# Altium PCB PCB.PcbDoc
Units mil, origin at the board's own origin, x right, y up, seen from the top; angles counter-clockwise.
Board outline 440 x 605 mil, 2 copper layers (Top Layer, Bottom Layer); 6 components, 4 nets, 26 pads, 0 vias.
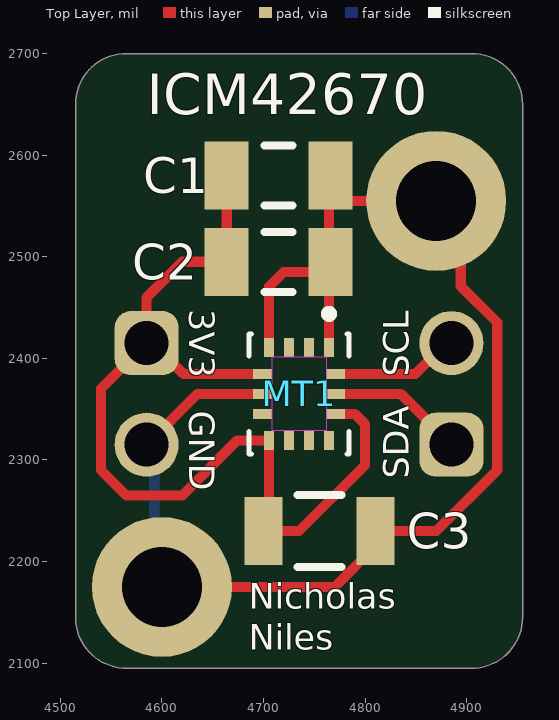
[diagram p0: Top Layer view]
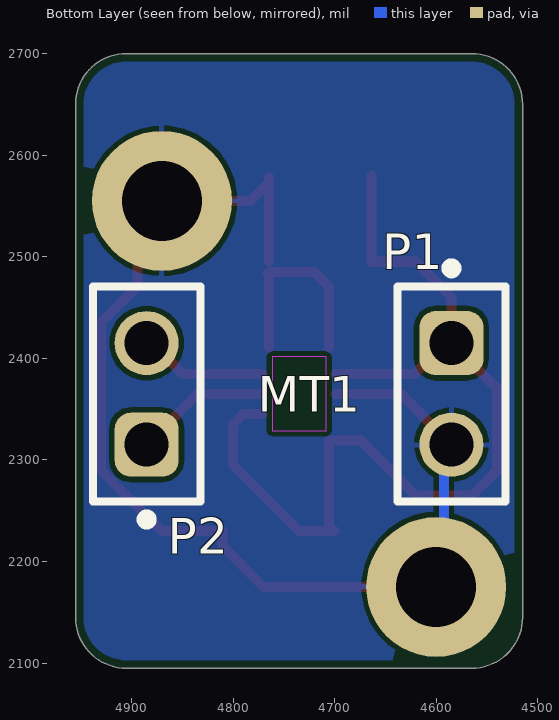
[diagram p1: Bottom Layer view, seen from below]
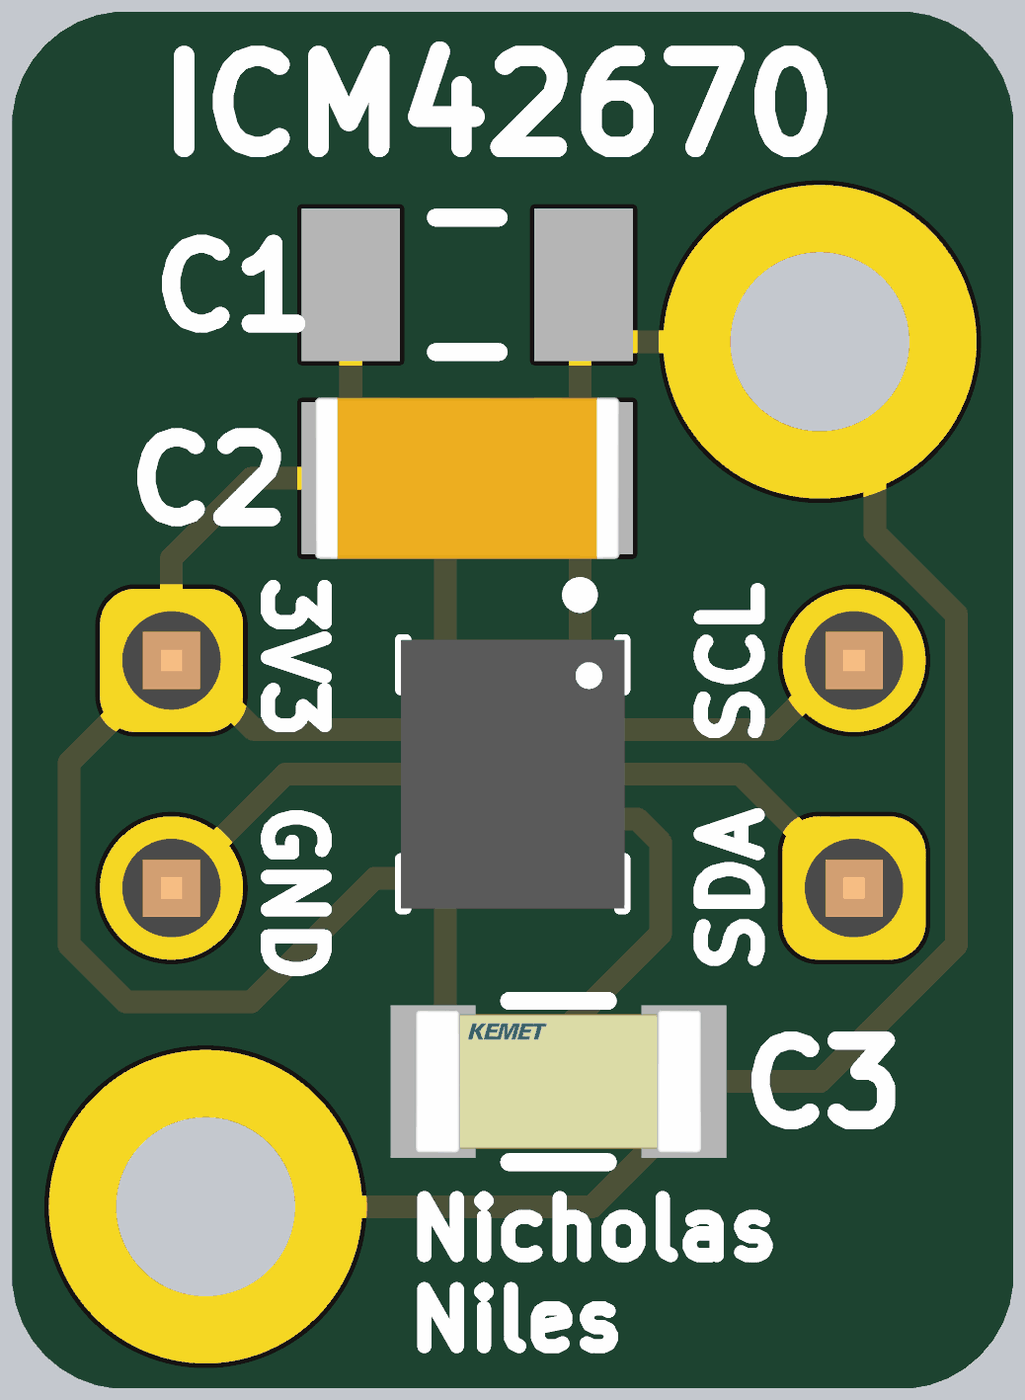
[diagram p2: 3D render of the assembled board from above, using the file's embedded part models]

## Layer stack, top to bottom
Top Solder: solder mask 0.4, Solder Resist, Dk 3.5
Top Layer: signal copper 1.4
Dielectric 1: dielectric 12.6, FR-4, Dk 4.8
Bottom Layer: signal copper 1.4
Bottom Solder: solder mask 0.4, Solder Resist, Dk 3.5

## Board outline
4515,2145 4515,2650 cw(c4565,2650) 4565,2700 4905,2700 cw(c4905,2650) 4955,2650 4955,2145 cw(c4905,2145) 4905,2095 4565,2095 cw(c4565,2145)

## Design rules (kind name [scope] priority, off if disabled: settings)
BoardOutlineClearance [All] p1: gap=7.87 ignorepadtopadclearanceinfootprint=FALSE
Clearance [All] p1: gap=5 ignorepadtopadclearanceinfootprint=TRUE except(10: Arc-Hole Track-Hole SMDPad-Hole THPad-Hole Via-Hole Fill-Hole Poly-Hole Region-Hole Text-Hole)
ComponentClearance [All] p1: gap=5 collisioncheckmode=3 verticalgap=5 showdistances=TRUE
DiffPairsRouting [All] p1: maxlimit=10 minlimit=5 mostfreqgap=5 toplayer_minwidth=5 toplayer_maxwidth=1000 toplayer_prefwidth=5 bottomlayer_minwidth=5 bottomlayer_maxwidth=1000 bottomlayer_prefwidth=5 maxuncoupledlength=500
Height [All] p1: minheight=0 maxheight=71497.94 prefheight=500
HoleSize [All] p1: absolutevalues=TRUE maxlimit=248.03 minlimit=11.81 maxpercent=80.000 minpercent=20.000
HoleToHoleClearance [All] p1: gap=10 allowstackedmicrovias=FALSE
MinimumAnnularRing [All] p1: minimumring=6
MinimumSolderMaskSliver [All] p1: minsoldermaskwidth=6
PlaneClearance [All] p1: clearance=5
PlaneConnect PlaneConnectPowerPads [InPadClass('PowerPads')] p1: planeconnectstyle=Direct reliefexpansion=20 reliefentries=4 reliefconductorwidth=10 reliefairgap=10
PlaneConnect [All] p2: pad.planeconnectstyle=Relief pad.reliefexpansion=11.81 pad.reliefentries=4 pad.reliefconductorwidth=5 pad.reliefairgap=5 via.planeconnectstyle=Direct via.reliefexpansion=11.81 via.reliefentries=4 via.reliefconductorwidth=5 via.reliefairgap=5
PolygonConnect PolygonConnectPowerPads [All vs (InPadClass('PowerPads'))] p1: connectstyle=Direct reliefconductorwidth=10 reliefentries=4 polygonreliefangle="90 Angle" airgapwidth=10
PolygonConnect [All] p2: thpad.connectstyle=Relief thpad.reliefconductorwidth=5 thpad.reliefentries=4 thpad.polygonreliefangle="90 Angle" thpad.airgapwidth=5 smdpad.connectstyle=Relief smdpad.reliefconductorwidth=5 smdpad.reliefentries=4 smdpad.polygonreliefangle="90 Angle" smdpad.airgapwidth=5 via.connectstyle=Direct via.reliefconductorwidth=5 via.reliefentries=4 via.polygonreliefangle="90 Angle" via.airgapwidth=5
RoutingVias [All] p1: holewidth=11.81 width=23.62 viastyle="Through Hole" minholewidth=11.81 minwidth=23.62 maxholewidth=23.62 maxwidth=259.84
SilkToSilkClearance [All] p1: silktosilkclearance=5
SilkToSolderMaskClearance [IsPad] p1: minsilkscreentomaskgap=5 clearancetoexposedcopper=TRUE
SolderMaskExpansion [All] p1: expansion=2 istentingtop=FALSE
SupplyNets "Schematic Supply Nets_1" [InNet('3V3')] p1: voltage=0.000
SupplyNets "Schematic Supply Nets" [InNet('GND')] p2: voltage=0.000
UnRoutedNet [All] p1: checkbadconnections=TRUE
Width Width_10mil [All] p1: maxlimit=1000 minlimit=10 preferedwidth=10 minimp=50.000000 maximp=50.000000 favimp=50.000000
Width Width_6mil [All] p2: maxlimit=1000 minlimit=6 preferedwidth=6 minimp=50.000000 maximp=50.000000 favimp=50.000000
Width Power_20mil [All] p3: maxlimit=1000 minlimit=20 preferedwidth=20 minimp=50.000000 maximp=50.000000 favimp=50.000000
Width Power_12mil [All] p4: maxlimit=1000 minlimit=12 preferedwidth=12 minimp=50.000000 maximp=50.000000 favimp=50.000000
Width Width_5mil [All] p5: maxlimit=1000 minlimit=5 preferedwidth=5 minimp=50.000000 maximp=50.000000 favimp=50.000000
19 further rules are at their usual default settings.

## Components (designator, comment, footprint, x,y, rotation, side; value= is the part's Value field where it differs from the comment)
C1 "2.2µF" CAPC3216X180X50LL20T25 4715,2580 r180 top
C2 "0.1µF" CAPC3216X100X50LL20T25 4715,2495 r180 top
C3 "10nF" FP-C1206C-EB-MFG 4755.12,2230 r0 top value="10,000 pF"
MT1 "ICM-42670-P" XDCR_ICM-42670-P 4735,2365 r270 top
P1 "61300211121" 61300211121 4585,2365 r270 bottom
P2 "61300211121" 61300211121 4885,2365 r90 bottom

## Footprints (in the part's own frame and the unit in brackets; to place one, negate y for a bottom-side part, rotate by r counter-clockwise, add the part's x,y. Pads: shape width x height; smd on the part's side, far side on the other; paste and mask are expansions set on the pad)
61300211121 [mm] "Pin Header, pitch 2.54 mm, THT, Vertical, single row, 2p"
  rrect50% 1.6x1.6 hole 1.1: 1(-1.27,0)
  round 1.6 hole 1.1: 2(1.27,0)
  silkscreen extent -3.26,-1.35 2.69,1.35, body extent -2.54,-1.27 2.54,1.27, height 8.57
CAPC3216X100X50LL20T25 [mm] "Chip Capacitor, 2-Leads, Body 3.4x1.8mm, IPC High Density"
  rect 1.1x1.7 smd: 1(-1.3,0) 2(1.3,0)
  silkscreen extent -0.35,-0.75 0.35,0.75, body extent -1.7,-0.9 1.7,0.9, height 1
CAPC3216X180X50LL20T25 [mm] "Chip Capacitor, 2-Leads, Body 3.20x1.60mm, IPC High Density"
  rect 1.1x1.7 smd: 1(-1.3,0) 2(1.3,0)
  silkscreen extent -0.35,-0.75 0.35,0.75, body extent -1.7,-0.9 1.7,0.9, height 1.8
FP-C1206C-EB-MFG [mm]
  rect 0.95x1.7 smd paste+0 mask+0: 1(-1.4,0) 2(1.4,0)
  silkscreen extent -0.55,-0.9 0.55,0.9, body extent -2,-1 2,1, height 0.25
XDCR_ICM-42670-P [mm]
  rect 0.475x0.25 smd paste-1 mask+0.05: 1(-1.162,0.75) 2(-1.162,0.25) 3(-1.162,-0.25) 4(-1.162,-0.75) 8(1.162,-0.75) 9(1.162,-0.25) 10(1.162,0.25) 11(1.162,0.75)
  rect 0.25x0.475 smd paste-1 mask+0.05: 5(-0.5,-0.913) 6(0,-0.913) 7(0.5,-0.913) 12(0.5,0.913) 13(0,0.913) 14(-0.5,0.913)
  Keep-Out Layer region: 0.925,-0.675 -0.925,-0.675 -0.925,0.675 0.925,0.675
  silkscreen extent -2.1,-1.25 1.5,1.25, body extent -1.5,-1.25 1.5,1.25, height 0.81

## Part data
C1: library part CMP-1037-04831-2, "Chip Capacitor, 2.2 uF, +/- 10%, 50 V, -55 to 125 degC, 1206 (3216 Metric), RoHS, Tape and Reel", Capacitance=2.2uF, Capacitance - nF=2200nF, Case Code - in=1206, Case Code - mm=3216, Case Height=1.6mm, Case Length=3.2mm, Dielectric=X7R, Manufacturer=Kemet, Maximum Operating Temperature=+125C, Minimum Operating Temperature=-55C, Operating Temperature Range=-55Cto+125C, Package / Case=1206(3216metric), Package Description="2-Pin Surface Mount Device, Body 3.2 x 1.6 mm", Temperature Coefficient / Code=+/-15%, Tolerance=10%, Voltage Rating=50V, Brand=Kemet, Case Width=1.6mm, Class=Class1, Datasheet URL=http://www.kemet.com/docfinder?Partnumber=C1206C225K5RACTU, Datasheet Version=02/2016, Dimensions=1.6mmWx3.2mmLx1.6mmH, Factory Pack Quantity=2000, Manufacturer URL=http://www.kemet.com/, Mounting Technology=SurfaceMount, Package Reference=1206, Packaging=Reel, Product=GeneralTypeMLCCs, Product Category=MultilayerCeramicCapacitorsMLCC-SMD/SMT, RoHS=Details, Series=C1206C, Termination Style=SMD/SMT, Type=SMDMLCCX7R6.3-250VDCCommericalGrade, Voltage Rating DC=50V
C2: library part CMP-1664-00001-4, "Chip Capacitor, 100 nF, +/- 10%, 25 V, -55 to 125 degC, 1206 (3216 Metric), RoHS, Tape and Reel", Manufacturer=Kemet, Max Operating Temperature="125 degC", Min Operating Temperature="-55 degC", Package Quantity=4000, Voltage Rating="25 V", ComponentLink1Description="Manufacturer URL", ComponentLink1URL=http://www.kemet.com/, ComponentLink2Description=Datasheet, ComponentLink2URL=http://www.kemet.com/docfinder?Partnumber=C1206F104K3RACTU, DatasheetVersion=02/2016, Height="0.78 mm", Length="3.2 mm", Mounting Technology="Surface Mount", PackageDescription="2-Pin Surface Mount Device, Body 3.2 x 1.6 mm", PackageReference=1206, Packaging="Tape and Reel", REACH SVHC="No SVHC", RoHSCompliant=true
C3: library part CMP-03020-003656-1, "CAP CER 10000PF 100V X7R 1206", Capacitance="10,000 pF", Manufacturer=KEMET, Manufacturer Part Number=C1206C103J1RACTU, Package=C1206C-EB, Temperature="-55°C to +150°C", Temperature Characteristic=X7R, Temperature Coefficient=15%, Temperature Range High=+150°C, Temperature Range Low=-55°C, Tolerance=0.05, Voltage Rating="100 V", Automotive=Yes, Automotive Grade="Grade 0", Category=Cap, ComponentLink2Description=Datasheet, ComponentLink2URL=https://content.kemet.com/datasheets/KEM_C1007_X8R_ULTRA_150C_SMD.pdf, Device Class L1="Passive Components", Device Class L2=Capacitors, Device Class L3="Ceramic Capacitors", Digikey Description="CAP CER 10000PF 100V X7R 1206", Height=0.88mm, Ipc Land Pattern Name=CAPC320160X78, Lead Free=Yes, Material=Ceramic, Mouser Description="1206 C 10nF Ceramic Multilayer Capacitor, 100 VDC, +125degC, X7R Dielec, +/-5%", Octopart=https://octopart.com/c1206c103j1ractu-kemet-121270, RoHS=TRUE
MT1: Package=None, Availability=Unavailable, MP=ICM-42670-P, Price=None
P1 P2: library part CMP-1712-00002-6, Color=Black, Contact Resistance=20mΩ, Current Rating=3A, Max Operating Temperature=125°C, Min Operating Temperature=-40°C, Operating Supply Voltage=250V, Connector Type="Male Pin", Contact Gender=Male, Contact Material=Copper, Contact Mating Length=5.9944mm, Contact Plating=Gold, Gender=Male, Height=8.94mm, Housing Material=PBT, Lead Free="Lead Free", Lead Pitch=2.54mm, Mount="Through Hole", NexarPartId=20081794, Number of Contacts=2, Number of Pins=2, Number of Positions=2, Number of Rows=1, Orientation=Vertical, Packaging=Bulk, Pitch=2.54mm, REACH SVHC="No SVHC", RoHS=Compliant, Termination="Through Hole", Voltage Rating=250V

## Free pads (board coordinates)
  round 137.79 hole 78.74: 7(4600,2175) 7(4870,2555)

## Nets (pads, with @x,y where several pads share a name; then routed paths per layer and width w, separated by ;. In a path a pad name is that pad's centre, name@x,y a point inside that pad or via, vN(x,y) a via of type N, cw(c..) or ccw(c..) an arc to the next point about the centre after c; other vN are vias at no path point)
3V3: C1.2 C2.2 C3.1 MT1.5 MT1.8 MT1.12 P1.1 | length 975.9
  Top Layer w10: C1.2 C2.2 4620,2495 4585,2460 P1.1 ; MT1.5 4621.13,2384.68 4590.82,2415 P1.1 ; C3.1 4735,2230 4800,2295 4800,2335 4789.69,2345.32 MT1.12 ; C3.1@4705.47,2235.47 MT1.8 4674.23,2319.23 4620,2265 4565,2265 4540,2290 4540,2370 P1.1
GND: C1.1 C2.1 C3.2 MT1.1 MT1.4 MT1.6 P1.2 pad.7 | length 1351.5
  Top Layer w10: P1.2 4635,2365 MT1.6 ; pad.7@4600,2175 4770,2175 4810.24,2215.24 C3.2 4870,2230 4930,2290 4930,2435.21 4894.11,2471.1 4894.11,2530.89 4870,2555 4782.83,2555 C1.1@4764.53,2573.31 ; MT1.4 4705.47,2470.47 4720,2485 4764.37,2485 C2.1@4766.18,2483.19 ; MT1.1 C2.1@4764.53,2481.54 ; C2.1@4764.53,2495 C1.1@4764.53,2573.31 ; C1.1@4764.53,2578.35 C1.1@4764.53,2573.31
  Bottom Layer w10: P1.2 4592.5,2307.5 4592.5,2182.5 pad.7@4600,2175
SCL: MT1.13 P2.1 | length 134.8
  Top Layer w10: MT1.13 4835,2365 P2.1
SDA: MT1.14 P2.2 | length 126.6
  Top Layer w10: MT1.14 4849.56,2384.68 4879.87,2415 P2.2
pads on no net: MT1.2 MT1.3 MT1.7 MT1.9 MT1.10 MT1.11

## Polygon pours and split planes (outlines as drawn)
GND on Bottom Layer "NONET_L02_P-001" (solid, pour order 0): 4515,2700 4955,2700 4955,2095 4515,2095

## Silkscreen, mask and mechanical layers (free items; w line width, h text height)
Top Overlay:
  text "ICM42670" at 4585.05,2640.01 h40
  text "3V3" at 4627,2448.32 h25 r270
  text "SCL" at 4843,2381.68 h25 r90
  text "GND" at 4627,2348.32 h25 r270
  text "SDA" at 4843,2281.68 h25 r90
  text "Nicholas" at 4685.59,2153.35 h25
  text "Niles" at 4685.59,2113.35 h25
Mechanical 1:
  the board outline again, w10